# Altium PCB CoreV1.0.0.PcbDoc
Units mil, origin at the board's own origin, x right, y up, seen from the top; angles counter-clockwise.
Board outline 1968.5 x 1574.8 mil, 2 copper layers (Top Layer, Bottom Layer); 49 components, 60 nets, 213 pads, 48 vias.
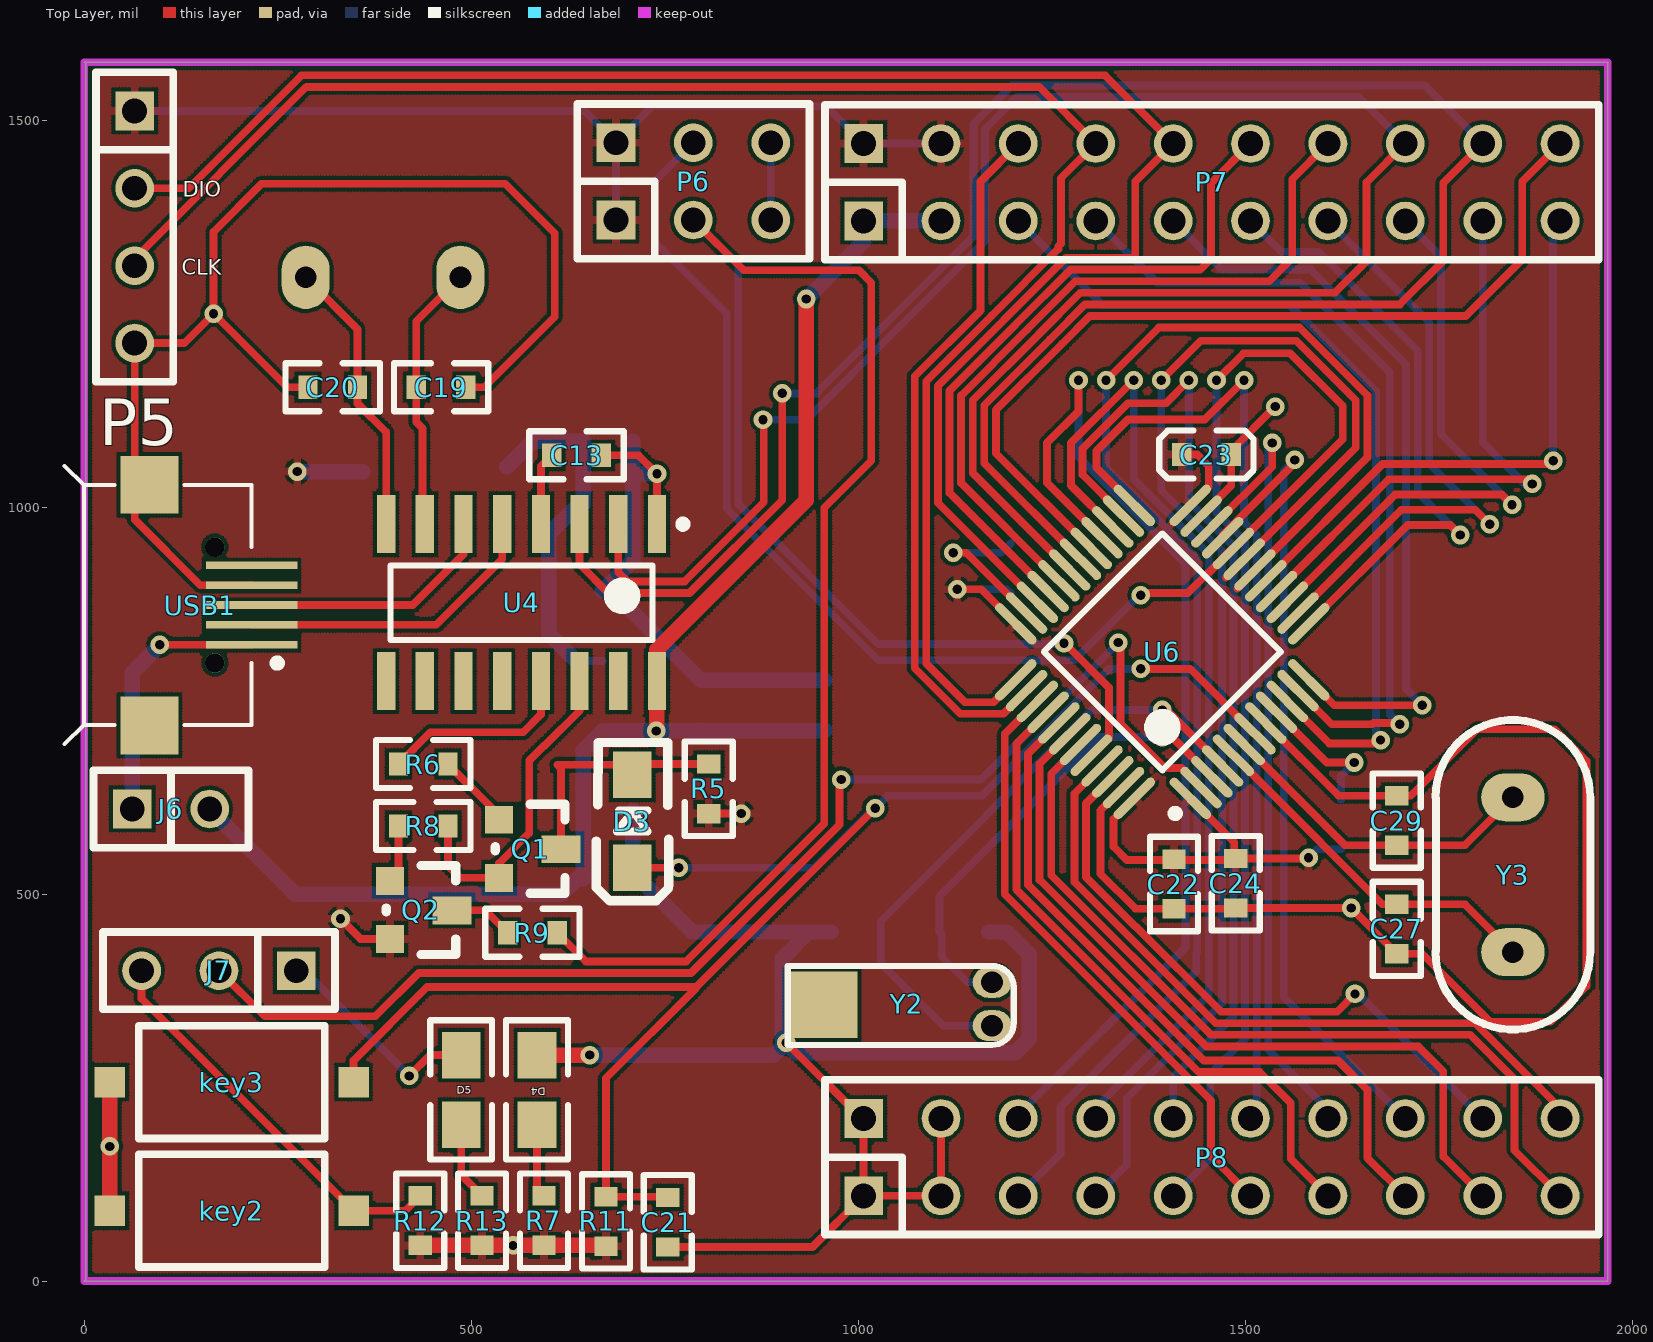
[diagram p0: Top Layer view]
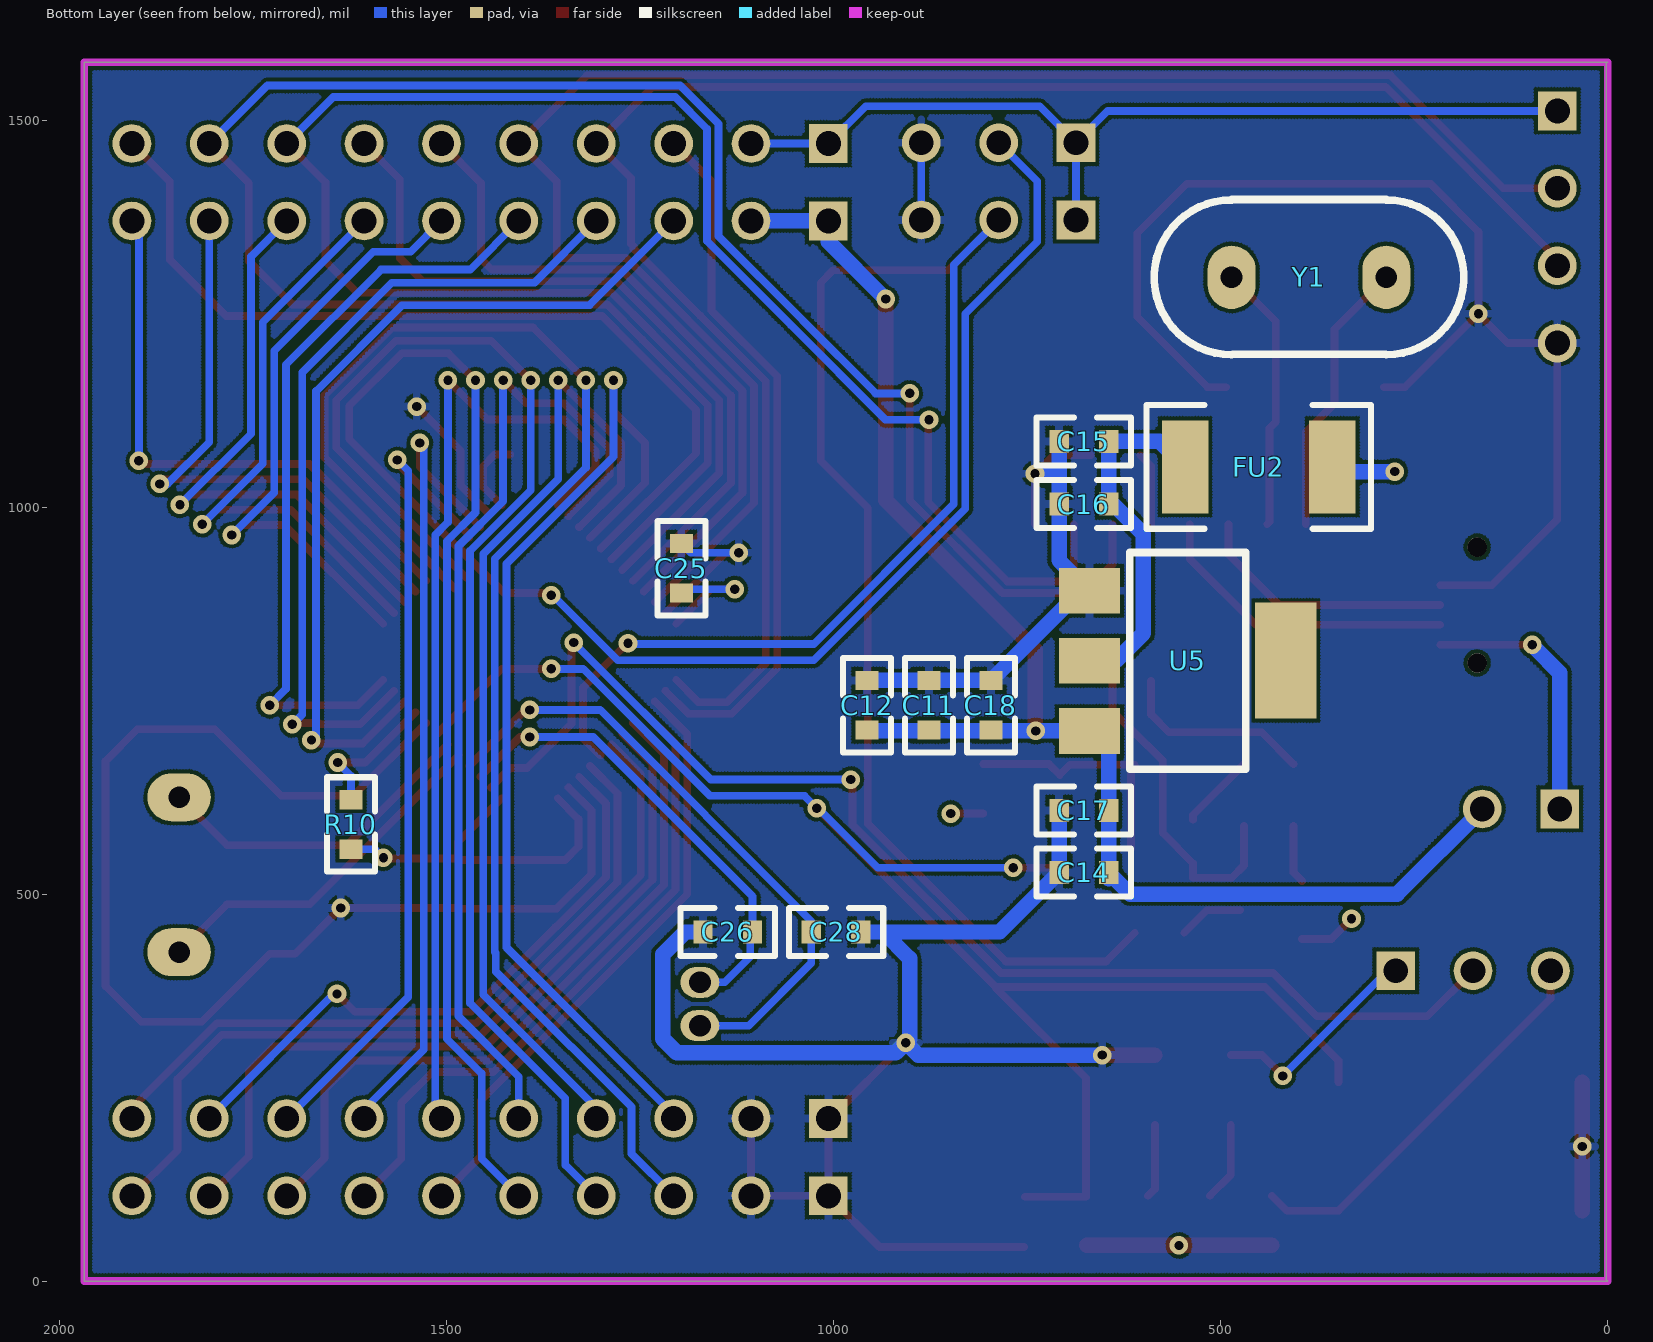
[diagram p1: Bottom Layer view, seen from below]
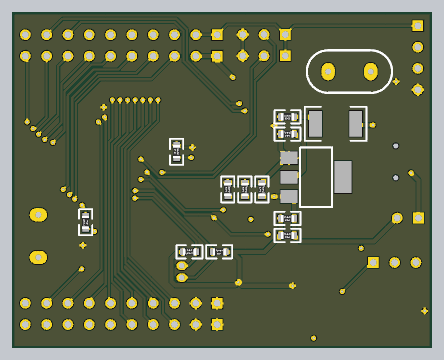
[diagram p2: 3D render of the assembled board from below, using the file's embedded part models]

## Layer stack, top to bottom
Top Layer: signal copper 1.4
Dielectric: dielectric 12.6, FR-4, Dk 4.8
Bottom Layer: signal copper 1.4

## Board outline
2,1574.8 2,2 0,0 1968.5,0 1968.5,1574.8 0,1574.8

## Design rules (kind name [scope] priority, off if disabled: settings)
Clearance slik [OnLayer('Top Overlay') vs OnLayer('Top Overlay')] p1: gap=2
Clearance [All] p2: gap=5
PolygonConnect [All] p1: connectstyle=Relief reliefconductorwidth=10 reliefentries=4 polygonreliefangle="90 Angle"
RoutingVias [All] p1: holewidth=12 width=24 viastyle="Through Hole" minholewidth=8 minwidth=20 maxholewidth=28 maxwidth=40
SilkscreenOverComponentPads [All] p1: minsilkscreentomaskgap=10
SolderMaskExpansion [All] p1: expansion=4
Width PWR [InNetClass('PWR')] p1: maxlimit=60 minlimit=10 preferedwidth=25
Width [All] p2: maxlimit=50 minlimit=10 preferedwidth=10
27 further rules are at their usual default settings.

## Classes and differential pairs
net class PWR: 3.3V 5V GND VUSB

## Components (designator, comment, footprint, x,y, rotation, side; value= is the part's Value field where it differs from the comment)
C11 "Cap Pol" 0603R 877,744 r90 bottom
C12 "Cap" 0603R 957,744 r90 bottom
C13 "Cap" 0603R 636,1067 r0 top
C14 "Cap" 0603R 676.9,527.89 r0 bottom
C15 "Cap Pol" 0603R 676.9,1084.89 r0 bottom
C16 "Cap" 0603R 676.9,1004 r0 bottom
C17 "Cap Pol" 0603R 676.9,608 r0 bottom
C18 "Cap" 0603R 797,744 r90 bottom
C19 "Cap" 0603R 461,1155 r180 top
C20 "Cap" 0603R 321,1155 r0 top
C21 "Cap" 0603R 754,76 r90 top
C22 "Cap" 0603R 1408,513 r270 top
C23 "Cap" 0603C 1450,1068 r0 top
C24 "Cap" 0603R 1488,514 r270 top
C25 "Cap" 0603R 1197,921 r90 bottom
C26 "Cap" 0603R 1137,451 r180 bottom
C27 "Cap" 0603R 1696,455 r90 top
C28 "Cap" 0603R 997,451 r0 bottom
C29 "Cap" 0603R 1696,595 r270 top
D3 "Diode" 贴片二极管 708,654 r270 top
D4 "PowerLED" 0805 585,202 r90 top
D5 "UserLED" 0805 487,202 r90 top
FU2 "FUSE" 1812R 451,1052 r180 bottom
J6 "CON2" SIP2 62,610 r0 top
J7 "CON3" SIP3 274,401 r180 top
key2 "KEY" 3*6*2.5KEY 33,90.83 r0 top
key3 "KEY" 3*6*2.5KEY 347.96,257 r180 top
P5 "JLINK-SWD" SIP4 65,1512 r270 top
P6 "CON2X3" SIP2x3 687,1371 r0 top
P7 "CON2X10" SIP2x10 1007,1369.84 r0 top
P8 "CON2X10" SIP2x10 1007,110 r0 top
Q1 "S8050" SOT-23 616,556 r270 top
Q2 "S8550" SOT-23 475,477 r270 top
R5 "Res" 0603R 807,636 r90 top
R6 "Res" 0603R 438,668 r0 top
R7 "Res" 0603R 594,78 r90 top
R8 "Res" 0603R 438,588 r180 top
R9 "Res" 0603R 579,450 r0 top
R10 "Res" 0603R 1624,590 r270 bottom
R11 "Res" 0603R 674,77 r270 top
R12 "Res" 0603R 434,78 r90 top
R13 "Res" 0603R 514,78 r90 top
U4 "CH340" CH340G 565,876.62 r270 top
U5 "ASM1117" SOT223 669.54,891.88 r270 bottom
U6 "STM32F103C8T6" LQFP48_N 1393,813 r135 top
USB1 "USB" MICRO_USB -0.65,873.49 r180 top
Y1 "XTAL" XTAL 386,1297 r0 bottom
Y2 "XTAL" XTAL32 1173,330 r180 top
Y3 "XTAL" XTAL 1846,525 r90 top

## Footprints (in the part's own frame and the unit in brackets; to place one, negate y for a bottom-side part, rotate by r counter-clockwise, add the part's x,y. Pads: shape width x height; smd on the part's side, far side on the other; paste and mask are expansions set on the pad)
3*6*2.5KEY [mm]
  rect 1x1 smd: 1(0,0) 2(8,0)
  silkscreen extent 0.95,-1.85 7.05,1.85
0603C [mil]
  rect 25x30 smd: 1(-32,0) 2(32,0)
  silkscreen extent -61,-31 61,31, body extent -31,-16 32,16, height 24
0603R [mil]
  rect 25x30 smd: 1(-32,0) 2(32,0)
  silkscreen extent -61,-31 61,31, body extent -31,-17 31,17, height 18
0805 [mil]
  rect 60x50 smd: 1(0,0) 2(90,0)
  silkscreen extent -45,-40 135,40
1812R [mil]
  rect 60x120 smd: 1(-95,0) 2(95,0)
  silkscreen extent -145,-80 145,80
CH340G [mm]
  rect 1.9x0.6 smd: 1(-2.575,4.445) 2(-2.575,3.175) 3(-2.575,1.905) 4(-2.575,0.635) 5(-2.575,-0.635) 6(-2.575,-1.905) 7(-2.575,-3.175) 8(-2.575,-4.445) 9(2.575,-4.445) 10(2.575,-3.175) 11(2.575,-1.905) 12(2.575,-0.635) 13(2.575,0.635) 14(2.575,1.905) 15(2.575,3.175) 16(2.575,4.445)
  silkscreen extent -2.7,-4.3 1.22,5.42, body extent -1.98,-4.23 1.98,4.32, height 1.7
LQFP48_N [mm]
  oval 1.8x0.3 smd: 1(-4.05,2.75) 2(-4.05,2.25) 3(-4.05,1.75) 4(-4.05,1.25) 5(-4.05,0.75) 6(-4.05,0.25) 7(-4.05,-0.25) 8(-4.05,-0.75) 9(-4.05,-1.25) 10(-4.05,-1.75) 11(-4.05,-2.25) 12(-4.05,-2.75) 25(4.05,-2.75) 26(4.05,-2.25) 27(4.05,-1.75) 28(4.05,-1.25) 29(4.05,-0.75) 30(4.05,-0.25) 31(4.05,0.25) 32(4.05,0.75) 33(4.05,1.25) 34(4.05,1.75) 35(4.05,2.25) 36(4.05,2.75)
  oval 0.3x1.8 smd: 13(-2.75,-4.05) 14(-2.25,-4.05) 15(-1.75,-4.05) 16(-1.25,-4.05) 17(-0.75,-4.05) 18(-0.25,-4.05) 19(0.25,-4.05) 20(0.75,-4.05) 21(1.25,-4.05) 22(1.75,-4.05) 23(2.25,-4.05) 24(2.75,-4.05) 37(2.75,4.05) 38(2.25,4.05) 39(1.75,4.05) 40(1.25,4.05) 41(0.75,4.05) 42(0.25,4.05) 43(-0.25,4.05) 44(-0.75,4.05) 45(-1.25,4.05) 46(-1.75,4.05) 47(-2.25,4.05) 48(-2.75,4.05)
  silkscreen extent -4.17,-2.75 2.75,3.57, body extent -3.5,-3.5 3.5,3.5, height 1.6
MICRO_USB [mm]
  rect 3x0.25 smd: 1(-5.508,1.3) 2(-5.508,0.65) 3(-5.508,0) 4(-5.508,-0.65) 5(-5.508,-1.3)
  round 0.635 hole 0.635 unplated: MH1(-4.3,1.9) MH2(-4.3,-1.9)
  rect 1.9x1.9 smd: ""(-2.15,3.95) ""(-2.15,-3.95)
  silkscreen extent -6.47,-4.57 0.63,4.57
SIP2 [mil]
  rect 50x50 hole 32: 1(0,0)
  round 50 hole 32: 2(100,0)
  silkscreen extent -50,-50 150,50
SIP2x3 [mil]
  rect 50x50 hole 32: 1(0,0) 2(0,100)
  round 50 hole 32: 3(100,0) 4(100,100) 5(200,0) 6(200,100)
  silkscreen extent -50,-50 250,150
SIP2x10 [mil]
  rect 50x50 hole 32: 1(0,0) 2(0,100)
  round 50 hole 32: 3(100,0) 4(100,100) 5(200,0) 6(200,100) 7(300,0) 8(300,100) 9(400,0) 10(400,100) 11(500,0) 12(500,100) 13(600,0) 14(600,100) 15(700,0) 16(700,100) 17(800,0) 18(800,100) 19(900,0) 20(900,100)
  silkscreen extent -50,-50 950,150
SIP3 [mil]
  rect 50x50 hole 32: 1(0,0)
  round 50 hole 32: 2(100,0) 3(200,0)
  silkscreen extent -50,-50 250,50
SIP4 [mil]
  rect 50x50 hole 32: 1(0,0)
  round 50 hole 32: 2(100,0) 3(200,0) 4(300,0)
  silkscreen extent -50,-50 350,50
SOT223 [mil]
  rect 59x79 smd: 1(0,0) 2(90.55,0) 3(181.1,0)
  rect 150x79 smd: 4(89.88,253.54)
  silkscreen extent -49,52 231,202
SOT-23 [mil]
  rect 36x50 smd: 1(-2,0)
  rect 36x36 smd: 2(-40,-80) 3(35,-80)
  silkscreen extent -60,-85 55,5
XTAL [mil]
  oval 62x82 hole 28: 1(-100,0) 2(100,0)
  silkscreen extent -200,-100 200,100
XTAL32 [mil]
  oval 50x40 hole 28: 1(0,0) 2(0,-56)
  rect 92.13x86 smd: ""(220,-27)
  silkscreen extent -28,-77 264,25
贴片二极管 [mil]
  rect 60x50 smd: 1(120,0) 2(0,0)
  silkscreen extent -42,-46 162,47

## Part data
Q1: library part NPN, "NPN"
U6: "STM32 ARM-based 32-bit MCU Performance Line with 64 kB Flash, 20 kB Internal RAM, -40 to"

## Via types
v1: diameter 24, hole 12, Top Layer to Bottom Layer, 48 vias

## Nets (pads, with @x,y where several pads share a name; then routed paths per layer and width w, separated by ;. In a path a pad name is that pad's centre, name@x,y a point inside that pad or via, vN(x,y) a via of type N, cw(c..) or ccw(c..) an arc to the next point about the centre after c; other vN are vias at no path point)
3.3V: C22.1 C23.1 C24.1 C25.1 FU2.2 P5.1 P6.1 P6.2 P7.2 P7.4 Q2.3 R5.1 R7.1 R10.2 R11.2 R12.1 R13.1 U6.1 U6.24 U6.36 U6.48 | length 2387.3
  Top Layer w10: v1(331,468) 357,442 Q2.3 ; R5.1 v1(849,604) ; v1(1128,894) 1158.89,894 U6.36 ; U6.48 1330,596.89 1330,561 1347,544 1486,544 1486,566.89 U6.1 ; C23.1 1438,1068 1453,1053 1453,1026.11 U6.24 ; C24.1 1581,546 v1(1582,547)
  Top Layer w20: R12.1 R13.1 v1(554,46) R7.1 R11.2@673,46
  Bottom Layer w10: P5.1 646,1512 P6.2 ; P6.1 P6.2 ; P7.4 P7.2 958.84,1518 734,1518 P6.2 ; v1(1128,894) 1192,894 C25.1 ; v1(1582,547) 1593,558 R10.2
  Bottom Layer w20: v1(275,1046) FU2.2@360,1046
5V: C11.1 C12.1 C14.1 C17.1 C18.1 J6.2 P7.1 P7.3 U4.16 U5.3 | length 1900.4
  Top Layer w20: v1(739,710.78) 740,711.78 U4.16 740,816 933,1009 v1(933,1269)
  Bottom Layer w20: J6.2 272,500 617,500 C14.1 ; C14.1@644.9,519.89 C14.1 ; C18.1 C18.1@797,710.78 ; v1(933,1269) 1007,1343 P7.1 P7.3 ; C12.1 955.78,710.78 C18.1@797,710.78 ; C14.1 C17.1 644.9,686.13 U5.3 v1(739,710.78) C18.1@797,710.78
BOOT0: P6.3 R9.2 U6.44 | length 2477.9
  Top Layer w10: R9.2 648,413 777.79,413 956,591.21 956,999 1017,1060 1017,1290 1001,1306 852,1306 P6.3 ; v1@1271,820 1324,767 1324,701 1302.37,679.37 U6.44
  Bottom Layer w10: P6.3 845,1313 845,1004 1026,823 1261,823 v1@1262,824
  other v1: 1266,824
BOOT1: P6.4 P8.9 U6.20 | length 2942.4
  Top Layer w10: v1@1366,889 1425.79,889 1452.79,916 ; v1(1463,1164) 1498,1199 1558,1199 1626,1131 1626,1087.76 U6.20 ; U6.20@1484.87,946.87 U6.20 ; 1452.79,916 1483.41,946.63 U6.20 ; 1452.79,916 1454.24,916 U6.20
  Bottom Layer w10: P6.4@787,1456 P6.4 737,1421 737,1343 830,1250 830,997.79 1025.79,802 1279,802 1363,886 v1(1365,886) ; P8.9 1455,158 1455,268 1500,313 1500,956.07 1463,993.07 v1(1463,1164)
D+: U4.5 USB1.2 | length 404
  Top Layer w10: USB1.2 454.9,847.9 540,933 U4.5
D-: U4.6 USB1.3 | length 339.9
  Top Layer w10: USB1.3 424.49,873.49 490,939 U4.6
DTR: R6.1 U4.13 | length 253.8
  Top Layer w10: R6.1 447,709 567,709 590,732 U4.13
GND: C11.2 C12.2 C13.2 C14.2 C15.2 C16.2 C17.2 C18.2 C19.1 C20.1 C21.1 C22.2 C23.2 C24.2 C25.2 C26.1 C27.1 C28.1 C29.1 D4.2 key2.1 key3.2 P5.4 P6.5 P6.6 P8.1 P8.2 P8.3 P8.4 U4.1 U5.1 U6.8 U6.23 U6.35 U6.47 USB1.4 USB1.@84,1029 Y2. | length 6650.4
  Top Layer w10: USB1.4 149.92,899.08 65,984 P5.4 129,1212 v1(167,1250) ; C20.1 262,1155 v1(167,1250) ; C19.1 517,1155 608,1246 608,1354 544,1418 229,1418 167,1356 v1(167,1250) ; C13.2 716,1067 v1(740,1043) U4.1 ; C21.1 941,44 P8.1 ; v1(907,308) 1005,210 P8.2 P8.1 ; P8.4 P8.3 P8.1 ; v1(1123,941) 1139.73,941 U6.35 ; U6.47 1342.62,637.62 1313,608 1313,526.49 1358.47,481.03 1487.03,481.03 C24.2 v1(1637,482) C27.1 1729,423 1817,335 1895,335 1941,381 1941,672 1900,713 1800,713 1714,627 C29.1 1620.76,627 U6.8 ; U6.23@1445.11,991.11 1482,1028 C23.2 1482,1073 v1(1539,1130)
  Top Layer w20: key2.1 key3.2 ; D4.2 v1(653,292)
  Bottom Layer w10: P6.5 P6.6 ; v1@902,313 v1(907,308) ; v1(1123,941) 1185,941 C25.2
  Bottom Layer w20: v1(653,292) 891,292 v1(907,308) 920,295 1203,295 1221,313 1221,422 1192,451 C26.1 ; C17.2 C14.2 785.79,451 936,451 ; C15.2 708.9,1043 ; v1(740,1043) 708.9,1043 ; v1@902,313 902,417 936,451 ; C12.2 C18.2 681.12,891.88 U5.1 708.9,931.23 C16.2 708.9,1043 ; C28.1 936,451
  other v1: 33,173.92
NetC13_1: C13.1 U4.4 | length 94.8
  Top Layer w10: U4.4 590,1053 C13.1
NetC15_1: C15.1 C16.1 FU2.1 U5.2 | length 466.8
  Bottom Layer w10: U5.2@635.67,801.33 U5.2 ; C16.1@639,1004 C16.1
  Bottom Layer w20: FU2.1 578.89,1084.89 C15.1 C16.1 ; U5.2@635.67,801.33 600,837 600,965 C16.1@639,1004
NetC19_2: C19.2 U4.7 Y1.2 | length 347.2
  Top Layer w10: U4.7 437,981 437,1102 429,1110 C19.2 429,1240 Y1.2
NetC20_2: C20.2 U4.8 Y1.1 | length 362.1
  Top Layer w10: Y1.1 353,1230 C20.2 353,1134 390,1097 U4.8
NetD3_2: D3.2 Q1.1 R5.2 | length 318.3
  Top Layer w10: Q1.1 616,662 611,667 695,667 D3.2 722,668 R5.2
NetD4_1: D4.1 R7.2 | length 95.7
  Top Layer w10: D4.1 585,119 R7.2
NetD5_1: D5.1 R13.2 | length 103.2
  Top Layer w10: D5.1 487,137 R13.2
NetD5_2: D5.2 J7.1 | length 280.5
  Top Layer w10: v1(420,265) 447,292 D5.2
  Bottom Layer w10: J7.1 284,401 v1(420,265)
NetJ7_3: J7.3 key2.2 R12.2 | length 517.6
  Top Layer w10: J7.3 74,364.79 key2.2 414.83,90.83 R12.2
NetQ1_2: Q1.2 R6.2 | length 99.3
  Top Layer w10: R6.2 536,602 Q1.2
NetQ2_1: Q2.1 R9.1 | length 84
  Top Layer w10: Q2.1 518,479 R9.1
NetQ2_2: Q2.2 R8.2 | length 75.6
  Top Layer w10: Q2.2 406,528 R8.2
NetR10_1: R10.1 U6.9 | length 182.4
  Top Layer w10: U6.9 1605.6,670 v1(1641,670)
  Bottom Layer w10: R10.1 1624,653 v1(1641,670)
NRST: C21.2 D3.1 key3.1 R11.1 U6.7 | length 2213
  Top Layer w10: key3.1 347.96,284.96 443,380 788,380 ; D3.1 v1(768,534) ; C21.2@753,109 R11.1 674,262 790,378 789,378 v1(1022,611) ; v1(1365,791) 1428.92,791 U6.7 1511.79,707.21 U6.7@1488.92,730.08
  Bottom Layer w10: v1(768,534) 943,534 1020,611 v1(1022,611) 1038,627 1160,627 1324,791 v1(1365,791)
PA0: P7.5 U6.10 | length 1160.2
  Top Layer w10: U6.10 1608.77,694.67 1670.67,694.67 v1(1675,699)
  Bottom Layer w10: P7.5 1315.84,1261 1558,1261 1669,1150 1669,696 1670.33,694.67 1674.67,699 v1(1675,699)
PA1: P7.7 U6.11 | length 1071.7
  Top Layer w10: U6.11 1611.94,719.33 1664.22,719.33 1665.89,721 1698,721 v1(1699.67,719.33)
  Bottom Layer w10: P7.7 1386.84,1290 1571,1290 1687,1174 1687,732 v1(1699.67,719.33)
PA2: P7.9 U6.12 | length 987
  Top Layer w10: U6.12 1615.11,744 v1(1729,744)
  Bottom Layer w10: P7.9 1469.84,1307 1585,1307 1708,1184 1708,765 v1(1729,744)
PA3: P7.11 U6.13 | length 800.3
  Top Layer w10: U6.13 1710.11,977 1765,977 v1(1778,964)
  Bottom Layer w10: P7.11 1546.84,1330 1595,1330 1723,1202 1723,1019 v1(1778,964)
PA4: P7.13 U6.14 | length 789.1
  Top Layer w10: U6.14 1701.96,996.69 1797.31,996.69 v1(1816,978)
  Bottom Layer w10: P7.13 1738,1238.84 1738,1056 v1(1816,978)
PA5: P7.15 U6.15 | length 777.8
  Top Layer w10: U6.15 1693.81,1016.37 1831.63,1016.37 v1(1845,1003)
  Bottom Layer w10: P7.15 1753,1323.84 1753,1095 v1(1845,1003)
PA6: P7.17 U6.16 | length 765.3
  Top Layer w10: U6.16 1685.65,1036.06 1864.94,1036.06 v1(1871,1030)
  Bottom Layer w10: P7.17 1807,1084 1861,1030 v1(1871,1030)
PA7: P7.19 U6.17 | length 749.2
  Top Layer w10: U6.17 1677.5,1055.74 1893.74,1055.74 v1(1898,1060)
  Bottom Layer w10: v1(1898,1060) 1898,1360.84 P7.19
PA8: P7.20 U6.29 | length 1160.7
  Top Layer w10: U6.29 1178,1069.76 1178,1125.51 1263,1210.51 1263,1210.72 1299.28,1247 1785,1247 1858,1320 1858,1420.84 P7.20
PA9: P7.18 U4.3 U6.30 | length 2796.8
  Top Layer w10: U4.3 640,926 677,889 782,889 902,1009 v1(902,1147) ; U6.30 1163,1056.92 1163,1131.72 1248,1216.72 1248,1216.93 1293.07,1262 1700,1262 1756,1318 1756,1418.84 P7.18
  Bottom Layer w10: v1(902,1147) 946,1147 1040.21,1241.21 1040.21,1241.43 1149,1350.21 1149,1495.21 1198.79,1545 1731.84,1545 P7.18
PA10: P7.16 U4.2 U6.31 | length 2546.8
  Top Layer w10: U4.2 690,916 702,904 775.79,904 878,1006.21 878,1110 v1@874,1114 ; U6.31 1148,1044.08 1148,1137.93 1233,1222.93 1233,1223.15 1286.85,1277 1616,1277 1657,1318 1657,1419.84 P7.16
  Bottom Layer w10: v1(877,1113) 933.21,1113 1055.21,1235 1055.21,1235.21 1164,1344 1164,1489 1205,1530 1646.84,1530 P7.16
PA11: P7.14 U6.32 | length 960.3
  Top Layer w10: U6.32 1133,1031.24 1133,1144.15 1218,1229.15 1218,1229.36 1280.64,1292 1531,1292 1561,1322 1561,1423.84 P7.14
PA12: P7.12 U6.33 | length 891
  Top Layer w10: U6.33 1118,1018.4 1118,1150.36 1203,1235.36 1203,1235.57 1274.43,1307 1442,1307 1456,1321 1456,1418.84 P7.12
PA13: P5.2 P7.10 U6.34 | length 2263
  Top Layer w10: P5.2 134.79,1412 280.79,1558 1318.84,1558 P7.10 1358,1420.84 1358,1323 1357,1322 1268.21,1322 1188,1241.79 1188,1241.57 1103,1156.57 1103,1005.56 U6.34
PA14: P5.3 P7.8 U6.37 | length 2284.2
  Top Layer w10: P5.3 65,1321 287,1543 1233.84,1543 P7.8 1262,1424.84 1262,1340.28 1258.72,1337 1258.72,1333.72 1173,1248 1173,1247.79 1088,1162.79 1088,798 1138,748 1174.89,748 U6.37
PA15: P7.6 U6.38 | length 914.9
  Top Layer w10: P7.6 1158,1420.84 1158,1254 1073,1169 1073,791.79 1131.79,733 1187.73,733 U6.38
PB0: P8.5 U6.18 | length 1920.1
  Top Layer w10: v1(1320.33,1164) 1388.33,1232 1570.43,1232 1658,1144.43 1658,1064.08 U6.18 1512.71,917.71 U6.18@1489.84,894.84
  Bottom Layer w10: P8.5 1261.5,164.5 1261.5,225 1339.5,303 1340,303 1437,400 1437,423.79 1438,424.79 1438,933.21 1320.33,1050.88 v1(1320.33,1164)
PB1: P8.7 U6.19 | length 1789.7
  Top Layer w10: v1(1391.67,1164) 1442.67,1215 1566.21,1215 1643,1138.21 1643,1076.92 U6.19 ; U6.19@1474.84,908.76 U6.19 ; U6.19@1521.65,955.57 U6.19
  Bottom Layer w10: P8.7 1347,150 1347,236 1470,359 1470,943.64 1391.67,1021.97 v1(1391.67,1164)
PB3: P8.11 U6.39 | length 787.9
  Top Layer w10: U6.39 1189.44,706.87 1189.44,499.64 1456,233.08 1456,161 P8.11
PB4: P8.13 U6.40 | length 854.9
  Top Layer w10: U6.40 1204.44,694.03 1204.44,505.86 1440.29,270 1519,270 1559,230 1559,158 P8.13
PB5: P8.15 U6.41 | length 931.3
  Top Layer w10: U6.41 1219.44,681.2 1219.44,512.07 1446.51,285 1620,285 1658,247 1658,159 P8.15
PB6: P8.17 U6.42 | length 1011.1
  Top Layer w10: U6.42 1234.44,668.36 1234.44,518.28 1449.65,303.07 1723.93,303.07 1756,271 1756,161 P8.17
PB7: P8.19 U6.43 | length 1067.6
  Top Layer w10: U6.43 1249.44,655.52 1249.44,524.49 1455.87,318.07 1790.93,318.07 1848,261 1848,169 P8.19
PB8: P8.20 U6.45 | length 926.4
  Top Layer w10: U6.45 1279.44,629.84 1279.44,515.71 1462.08,333.07 1797.15,333.07 1907,223.21 P8.20
PB9: P8.18 U6.46 | length 804.7
  Top Layer w10: U6.46 1294.44,617 1294.44,521.92 1358.86,457.5 1359.5,457.5 1468.93,348.07 1619.07,348.07 v1(1642,371)
  Bottom Layer w10: v1(1642,371) 1646,371 P8.18
PB10: P8.16 U6.21 | length 1061.8
  Top Layer w10: U6.21 1470.95,963.95 1564,1057 v1(1564,1061)
  Bottom Layer w10: v1(1564,1061) 1550,1047 1550,367 P8.16 P8.16@1707,211
PB11: P8.14 U6.22 | length 1047.8
  Top Layer w10: U6.22 1535,1052.44 v1(1535,1083)
  Bottom Layer w10: v1(1535,1083) 1530,1078 1530,980 1530,299 1607,222 P8.14
PB12: P8.12 U6.25 | length 1283.1
  Top Layer w10: U6.25 1308,1051.11 1308,1072.57 1348.71,1113.29 1447.95,1113.29 v1(1498.67,1164)
  Bottom Layer w10: v1(1498.67,1164) 1498.67,980.33 1515,964 1515,218 P8.12
PB13: P8.10 U6.26 | length 1293.4
  Top Layer w10: U6.26 1342.89,989.11 1290,1042 1290,1075.79 1348.61,1134.39 1397.73,1134.39 v1(1427.33,1164)
  Bottom Layer w10: P8.10 1407,264 1485,342 1485,949.85 1427.33,1007.52 v1(1427.33,1164)
PB14: P8.8 U6.27 | length 1300.9
  Top Layer w10: U6.27@1329.53,974.47 U6.27 1328.53,974.47 1275,1028 1275,1083 v1(1356,1164)
  Bottom Layer w10: P8.8 1307,224 1453,370 1453,939.43 1356,1036.43 v1(1356,1164)
PB15: P8.6 U6.28 | length 1351.5
  Top Layer w10: v1(1284.67,1164) 1284.67,1123.67 1244,1083 1244,1031.6 U6.28
  Bottom Layer w10: P8.6@1208,210 P8.6 1208,211 1208,216 1423,431 1423,927 1284.67,1065.33 v1(1284.67,1164)
PC13: J7.2 U6.2 | length 1665.1
  Top Layer w10: J7.2 233,342 376,342 432,398 784,398 975.79,589.79 975.79,648 v1(978,648) ; v1(1336,825) 1339,822 1339,720 1396,663 1417.73,663 U6.2
  Bottom Layer w10: v1(978,648) 1159,648 v1(1336,825)
RTS: Q1.3 R8.1 U4.14 | length 421.3
  Top Layer w10: R8.1 470,537 486,521 Q1.3 536,540 575,579 575,672.64 594.36,692 595,692 640,737 U4.14
VUSB: J6.1 USB1.1 | length 340.2
  Top Layer w10: v1(97.31,822.31) USB1.1
  Bottom Layer w20: J6.1 62,786 v1@94,818
XI1: C27.2 U6.5 Y3.1 | length 466.5
  Top Layer w10: U6.5 1519.24,645 1677.24,487 C27.2 1784,487 Y3.1
XI2: C26.2 U6.3 Y2.2 | length 616.6
  Top Layer w10: v1(1393,703) 1405.56,703 U6.3
  Bottom Layer w10: Y2.2 1141,386 1108,419 1108,448 C26.2 1105,497 1311,703 v1(1393,703)
XO1: C29.2 U6.6 Y3.2 | length 426.9
  Top Layer w10: U6.6 1629.08,563 C29.2 1784,563 Y3.2
XO2: C28.2 U6.4 Y2.1 | length 816.6
  Top Layer w10: v1(1393,738) 1398.4,738 U6.4
  Bottom Layer w10: Y2.1 1110,330 1029,411 C28.2 1029,465 1302,738 v1(1393,738)
pads on no net: U4.9 U4.10 U4.11 U4.12 U4.15 U5.4 USB1.5 USB1.@84,717.98 USB1.MH1 USB1.MH2

## Polygon pours and split planes (outlines as drawn)
3.3V on Top Layer "Top Layer-No Net" (hatched 90Degree grid 4 track 5, pour order 2): -8,1574 -8,0 1979.99,0 1981,1 1981,1575 1979.99,1574 -8,1574
GND on Bottom Layer "Top Layer-No Net" (hatched 90Degree grid 4 track 5, pour order 4): 5,1574 5,0 1970,0 1970,1576 1968,1574 5,1574

## Keep-outs
Keep-Out Layer:
  lines w10: -4574,-1861 -4562,-1873 ; -2494,-1873 -2489,-1868 ; 0,0 0,1574.8 1968.5,1574.8 1968.5,0 0,0

## Silkscreen, mask and mechanical layers (free items; w line width, h text height)
Top Overlay:
  text "DIO" at 127,1401 h20
  text "CLK" at 126,1300 h20